# Altium PCB PCB2.PcbDoc
Units mm, origin at the board's own origin, x right, y up, seen from the top; angles counter-clockwise.
Board outline 70.25 x 50.25 mm, 2 copper layers (Top Layer, Bottom Layer); 17 components, 13 nets, 43 pads, 0 vias.
Unrouted connection lines stored in the file: 1.
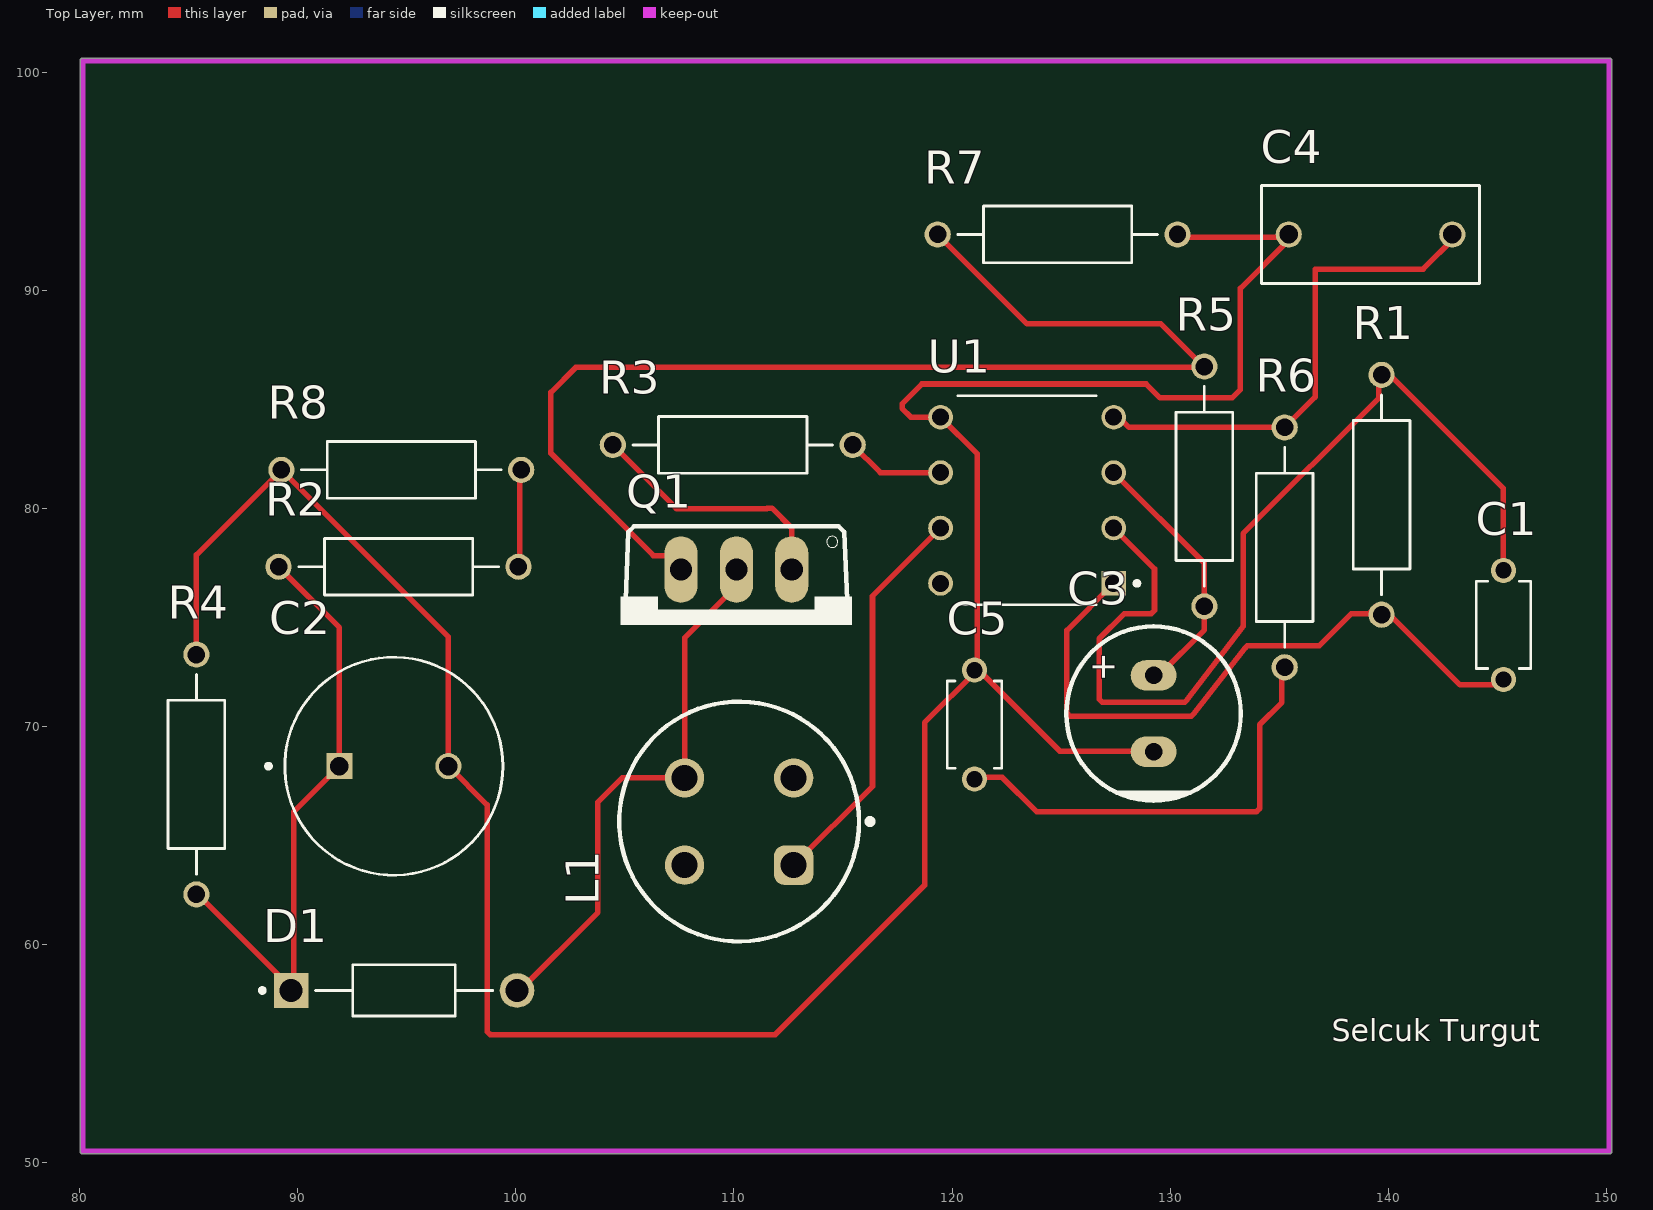
[diagram p0: Top Layer view]
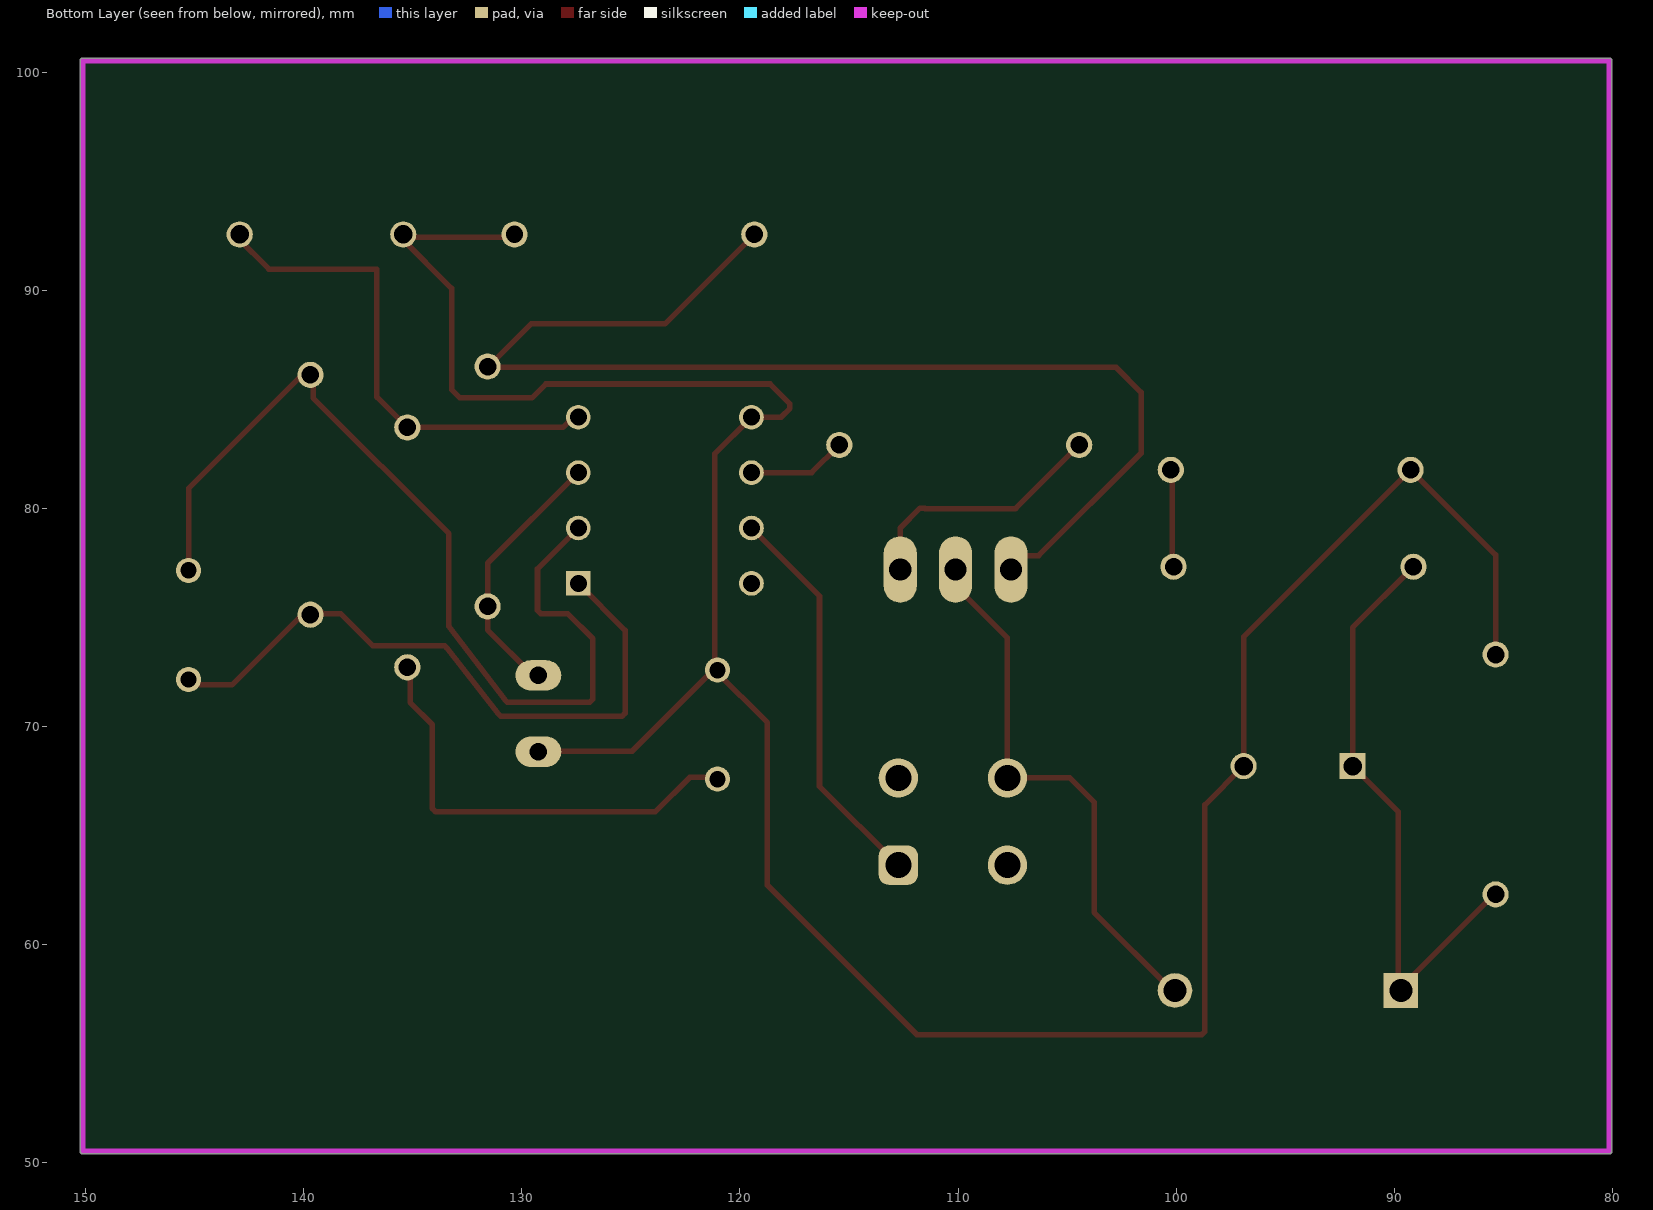
[diagram p1: Bottom Layer view, seen from below]
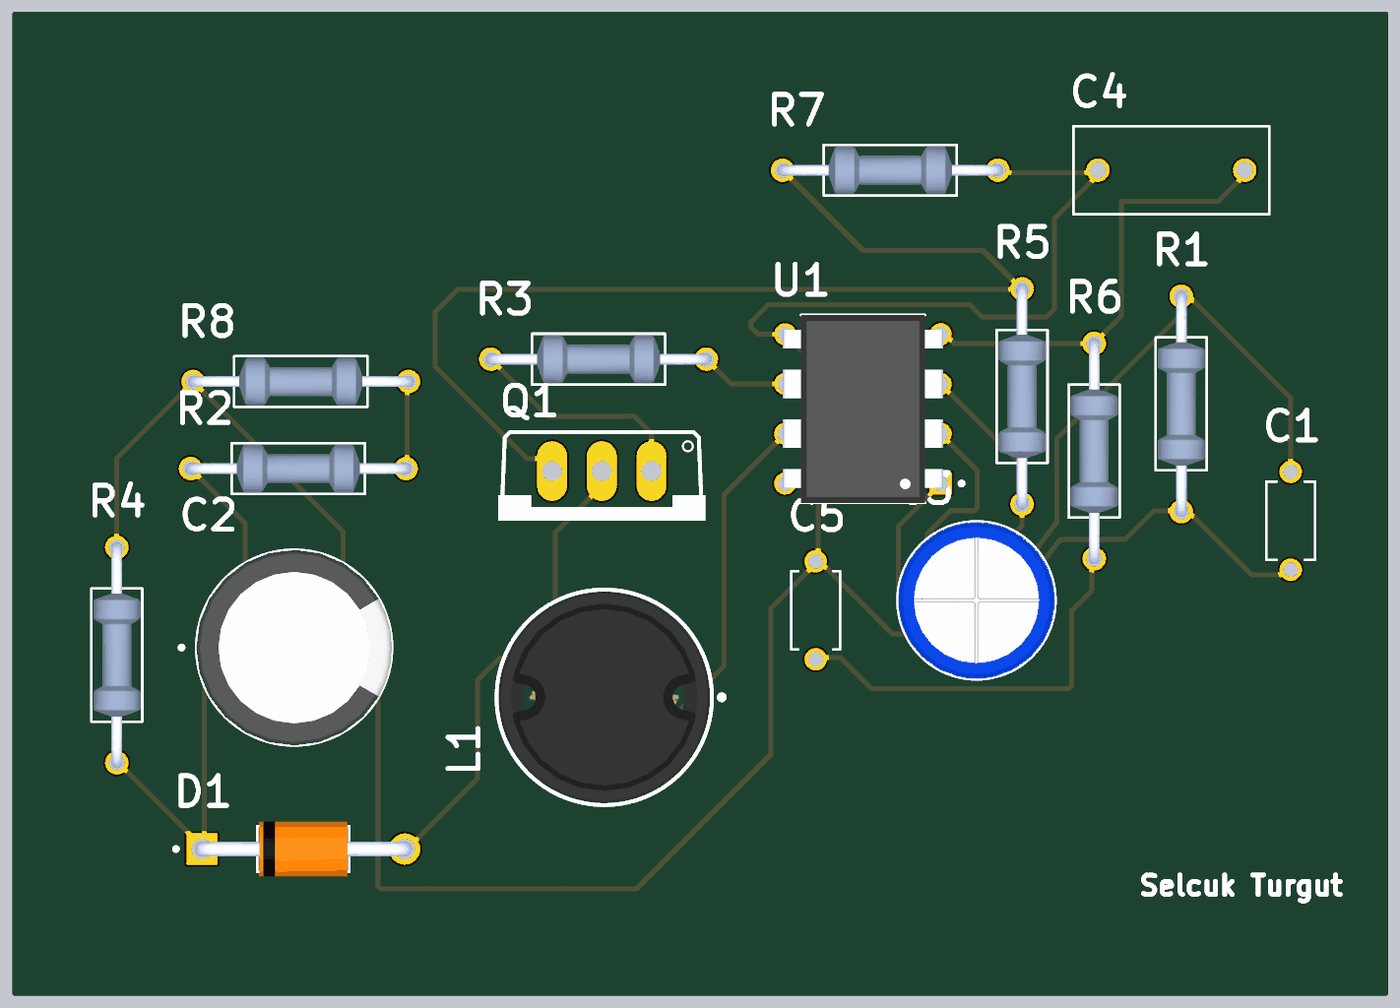
[diagram p2: 3D render of the assembled board from above, using the file's embedded part models]

## Layer stack, top to bottom
Top Solder: solder mask 0.0102, Solder Resist, Dk 3.5
Top Layer: signal copper 0.0356
Dielectric 1: dielectric 0.32, FR-4, Dk 4.8
Bottom Layer: signal copper 0.0356
Bottom Solder: solder mask 0.0102, Solder Resist, Dk 3.5

## Board outline
80.01,50.546 ccw(c80.137,50.546) 80.137,50.419 150.137,50.419 ccw(c150.137,50.546) 150.264,50.546 150.264,100.546 ccw(c150.137,100.546) 150.137,100.673 80.137,100.673 ccw(c80.137,100.546) 80.01,100.546

## Design rules (kind name [scope] priority, off if disabled: settings)
Clearance [All] p1: gap=0.254 ignorepadtopadclearanceinfootprint=FALSE except(0: Arc-Hole Track-Hole SMDPad-Hole THPad-Hole Via-Hole Fill-Hole Poly-Hole Region-Hole Text-Hole)
PolygonConnect [All] p1: connectstyle=Relief reliefconductorwidth=0.254 reliefentries=4 polygonreliefangle="90 Angle" airgapwidth=0.254
RoutingVias [All] p1: holewidth=0.711 width=1.27 viastyle="Through Hole" minholewidth=0.711 minwidth=1.27 maxholewidth=0.711 maxwidth=1.27
SolderMaskExpansion [All] p1: expansion=0.102 istentingtop=FALSE
Width [All] p1: maxlimit=0.254 minlimit=0.254 preferedwidth=0.254
30 further rules are at their usual default settings.

## Components (designator, comment, footprint, x,y, rotation, side; value= is the part's Value field where it differs from the comment)
C1 "22nF" CAP_RDER71H223K0M1H03A 145.288,74.676 r270 top
C2 "1000uF" CAPPRD500W60D1000H1600 94.401,68.199 r0 top
C3 "1.5 nF" "CAP TH ALPOLY D8.00mm S3.50mm H21.50mm" 129.243,70.611 r90 top
C4 "1.5nF" CAPRR750W60L1000T450H1000 139.192,92.583 r180 top
C5 "10nF" CAP_RDER71H103K0K1H03B 121.031,70.104 r90 top
D1 "UF4007" DIOAD1036W78L470D235 94.869,57.912 r0 top
L1 "100uH, 2.45A" WE-TI_1016 110.236,65.659 r180 top
Q1 "IRF640" *TO220V 110.109,74.676 r180 top
R1 "10K" RESAD1100W55L680D260 139.7,80.645 r90 top
R2 "100k" RESAD1100W55L680D260 94.615,77.343 r180 top
R3 "22" RESAD1100W55L680D260 109.943,82.931 r0 top
R4 "48" RESAD1100W55L680D260 85.344,67.818 r270 top
R5 "10" RESAD1100W55L680D260 131.572,81.026 r90 top
R6 "11.46K" RESAD1100W55L680D260 135.255,78.232 r90 top
R7 "0.1" RESAD1100W55L680D260 124.841,92.583 r180 top
R8 "5.6k" RESAD1100W55L680D260 94.742,81.788 r0 top
U1 "UC3843NG4" DIP794W45P254L959H508Q8 123.444,80.391 r180 top

## Footprints (in the part's own frame and the unit in brackets; to place one, negate y for a bottom-side part, rotate by r counter-clockwise, add the part's x,y. Pads: shape width x height; smd on the part's side, far side on the other; paste and mask are expansions set on the pad)
*TO220V [mil]
  oval 60x120 hole 40: 1(-100,-100) 2(0,-100) 3(100,-100)
  silkscreen extent -209,-178 209,0
"CAP TH ALPOLY D8.00mm S3.50mm H21.50mm" [mm] "8.00mm Diameter 21.50mm Lead Spacing Aluminum - Polymer Capacitors Radial, Can"
  oval 1.4x2.1 hole 0.8: 1(1.75,0) 2(-1.75,0)
  silkscreen extent -4,-4 4,4, body extent -4.01,-4 4,4, height 21.5
CAP_RDER71H103K0K1H03B [mm]
  round 1.15 hole 0.75: 1(-2.5,0) 2(2.5,0)
  silkscreen extent -2,-1.25 2,1.25
CAP_RDER71H223K0M1H03A [mm]
  round 1.15 hole 0.75: 1(-2.5,0) 2(2.5,0)
  silkscreen extent -2,-1.25 2,1.25
CAPPRD500W60D1000H1600 [mm]
  round 1.2 hole 0.85: N(2.5,0)
  rect 1.2x1.2 hole 0.85: P(-2.5,0)
  silkscreen extent -5.85,-5 5,5, body extent -5,-5 5,5, height 16
CAPRR750W60L1000T450H1000 [mm]
  round 1.2 hole 0.85: 1(-3.75,0) 2(3.75,0)
  silkscreen extent -5,-2.25 5,2.25
DIOAD1036W78L470D235 [mm]
  round 1.59 hole 1.06: A(5.18,0)
  rect 1.59x1.59 / inner round 1.59 / far side rect 1.59x1.59 hole 1.06: C(-5.18,0)
  silkscreen extent -6.6,-1.17 4.07,1.17, body extent -5.55,-1.4 5.55,1.4, height 2.8
DIP794W45P254L959H508Q8 [mm]
  rect 1.13x1.13 / inner round 1.13 / far side rect 1.13x1.13 hole 0.78: 1(-3.97,3.81)
  round 1.13 hole 0.78: 2(-3.97,1.27) 3(-3.97,-1.27) 4(-3.97,-3.81) 5(3.97,-3.81) 6(3.97,-1.27) 7(3.97,1.27) 8(3.97,3.81)
  silkscreen extent -5.13,-4.79 3.18,4.79, body extent -4.1,-4.79 4.1,4.79, height 5.08
RESAD1100W55L680D260 [mm]
  round 1.2 hole 0.8: 1(-5.5,0) 2(5.5,0)
  silkscreen extent -4.58,-1.3 4.58,1.3, body extent -5.77,-1.2 5.77,1.2, height 2.4
WE-TI_1016 [mm] "THT Radial Leaded Wire Wound Inductor with 4 Pins, body diameter 11mm"
  rrect50% 1.8x1.8 hole 1.2: 1(-2.5,2)
  round 1.8 hole 1.2: 2(2.5,-2) MH1(-2.5,-2) MH2(2.5,2)
  silkscreen extent -6.13,-5.5 5.5,5.5, body extent -5.4,-5.4 5.4,5.4, height 16.05

## Part data
C1: library part RDER71H223K0M1H03A, "Cap Ceramic 1pF 50V C0G 0.25pF Radial 5mm 125C Ammo", Package=None, Availability=Unavailable, MP=RDER71H223K0M1H03A, price=None
C2: library part EEUFK1C102B, "CAP ALUM 1000UF 20% 16V RAD TH", Package="RADIAL-2 Panasonic", Availability="Not in stock", Check_prices=https://www.snapeda.com/parts/EEUFK1C102B/Panasonic/view-part/5795499/?ref=eda, MF=Panasonic, MP=EEUFK1C102B, price=None, SnapEDA_Link=https://www.snapeda.com/parts/EEUFK1C102B/Panasonic/view-part/5795499/?ref=snap
C3 C5: library part RDER71H103K0K1H03B, "Lead Capacitor X7R_EIA_ with Capacitance: 10000pF and Rated Voltage: 50Vdc", Package="Radial Murata", Availability=Unavailable, MF=Murata, MP=RDER71H103K0K1H03B, price=None, SnapEDA_Link=https://www.snapeda.com/parts/RDER71H103K0K1H03B/Murata/view-part/4545040/?ref=snap
C4: library part ECQE6152KF, Package=None, Availability=Unavailable, MP=ECQE6152KF, price=None
D1: "75ns, 1A, 1000V, High Efficient Recovery Rectifier", Package="DO-41-2 Taiwan Semiconductor", Check_prices=https://www.snapeda.com/parts/UF4007/taiwan/view-part/?ref=eda, MF="Taiwan Semiconductor", MP=UF4007, SnapEDA_Link=https://www.snapeda.com/parts/UF4007/taiwan/view-part/?ref=snap
L1: library part 7447221101, "WE-TI Radial Leaded Wire Wound Inductor, size 1016, 100uH, 2.45A, 0.1Ohm", Case/Size Code=1016, DC Resistance Max=0.1Ohm, manufacturer="Wurth Elektronik", Operating Temperature Max=125°C, Operating Temperature Min=-40°C, Rated Current=2.45A, Saturation Current @ 10%=2.75A, Self Resonant Frequency=4MHz, Inductance=100uH, Category="Power Inductors", componentlink1description="Website Link", componentlink1url=https://www.we-online.com/redexpert/article/7447221101?ad, componentlink2description="Datasheet Link", componentlink2url=https://www.we-online.com/redexpert/spec/7447221101?ad, Diameter=11mm, Height=17mm, Manufacturer Part Number=7447221101, Match Code=WE-TI, Mount="Through Hole", packaging=Tray
Q1: "Single-Gate MOSFET Transistors 200V Single N-Channel HEXFET", Package="TO-220 STMicroelectronics", Check_prices=https://www.snapeda.com/parts/IRF640/STMicroelectronics/view-part/?ref=eda, MF=STMicroelectronics, MP=IRF640, SnapEDA_Link=https://www.snapeda.com/parts/IRF640/STMicroelectronics/view-part/?ref=snap
R1 R2 R3 R4 R5 R6 R7 R8: library part MFR-25FBF52-1K, "1.07 kOhms Â±1% 0.25W, 1/4W Through Hole Resistor Axial - Metal Film", Package="RADIAL-2 YAGEO", Check_prices=https://www.snapeda.com/parts/MFR-25FBF52-1K/Yageo/view-part/?ref=eda, MF=Yageo, MP=MFR-25FBF52-1K, SnapEDA_Link=https://www.snapeda.com/parts/MFR-25FBF52-1K/Yageo/view-part/?ref=snap
U1: "Single ended 500KHz current mode PWM controller with 8.4V/7.6V UVLO 100% duty cycle, 0C to 70C 8-PDIP 0 to 70", Package="PDIP-8 Texas", Check_prices=https://www.snapeda.com/parts/UC3843NG4/Texas+Instruments/view-part/?ref=eda, MF="Texas Instruments", MP=UC3843NG4, SnapEDA_Link=https://www.snapeda.com/parts/UC3843NG4/Texas+Instruments/view-part/?ref=snap

## Nets (pads, with @x,y where several pads share a name; then routed paths per layer and width w, separated by ;. In a path a pad name is that pad's centre, name@x,y a point inside that pad or via, vN(x,y) a via of type N, cw(c..) or ccw(c..) an arc to the next point about the centre after c; other vN are vias at no path point)
COMP: C1.2 R1.1 U1.1 | length 30.7
  Top Layer w0.254: U1.1 125.262,74.429 125.262,70.634 125.411,70.485 130.968,70.485 131.092,70.609 133.452,73.628 133.537,73.713 136.832,73.713 138.303,75.184 139.102,75.184 139.444,75.526 139.7,75.526 143.304,71.922 C1.2@145.288,71.922
GND: C2.N C3.2 C4.2 C5.2 R4.1 R7.1 R8.1 U1.5 | length 127.3
  Top Layer w0.254: R4.1 85.344,77.89 R8.1 96.901,74.129 C2.N 98.679,66.421 98.679,56.029 98.828,55.88 111.887,55.88 118.745,62.738 118.745,70.191 C5.2@121.158,72.604 ; C3.2@129.159,68.89 124.939,68.89 121.225,72.604 C5.2@121.158,72.604 ; R7.1@130.341,92.964 130.341,92.893 130.778,92.456 135.569,92.456 133.223,90.11 133.223,85.471 132.842,85.09 129.54,85.09 128.905,85.725 118.618,85.725 117.707,84.814 117.707,84.604 118.11,84.201 U1.5 121.158,82.517 C5.2@121.158,72.604
ISENSE: C3.1 R5.1 U1.3 | length 12.2
  Top Layer w0.254: U1.3 131.572,77.503 R5.1 131.572,74.453 129.509,72.39 C3.1@129.159,72.39
NetC2_P: C2.P D1.C R2.2 R4.2 | length 27.7
  Top Layer w0.254: R4.2 85.41,62.318 89.816,57.912 89.816,66.114 C2.P 91.901,74.557 R2.2
NetD1_A: D1.A L1.2 Q1.2 | length 25.1
  Top Layer w0.254: D1.A@100.176,57.912 103.759,61.495 103.759,66.548 104.87,67.659 L1.2 107.736,74.081 110.109,76.454 Q1.2
NetQ1_1: Q1.1 R3.1 | length 11.7
  Top Layer w0.254: R3.1 107.364,80.01 111.506,80.01 111.528,80.032 111.738,80.032 112.649,79.121 Q1.1
NetQ1_3: Q1.3 R5.2 R7.2 | length 56.2
  Top Layer w0.254: Q1.3 107.569,77.264 106.982,77.851 106.299,77.851 101.6,82.55 101.6,85.344 102.743,86.487 R5.2@131.484,86.487 ; R7.2 123.444,88.48 129.579,88.48 131.533,86.526 R5.2 ; R5.2@131.508,86.462 R5.2@131.572,86.399
NetR2_1: R2.1 R8.2 | length 4.5
  Top Layer w0.254: R2.1 100.178,77.406 100.178,81.724 R8.2
NetR3_2: R3.2 U1.6 | length 4.6
  Top Layer w0.254: R3.2 116.713,81.661 U1.6
RT/CT: C4.1 R6.2 U1.4 | length 22.9
  Top Layer w0.254: U1.4 127.651,84.201 128.12,83.732 R6.2 136.652,85.129 136.652,90.992 141.605,90.992 C4.1@143.069,92.456
VCC: L1.1 U1.7 | length 18.3
  Top Layer w0.254: L1.1 116.352,67.275 116.352,75.999 U1.7
VFB: C1.1 R1.2 U1.2 | length 45.3
  Top Layer w0.254: U1.2 129.286,77.249 129.286,75.343 129.137,75.195 127.9,75.195 126.746,74.041 126.746,71.269 126.895,71.12 130.663,71.12 130.737,71.194 130.749,71.206 133.35,74.614 133.35,78.867 139.573,85.09 139.573,86.399 139.7,86.526 145.288,80.938 C1.1@145.288,76.922
VREF: C5.1 R6.1 U1.8 | length 21.1
  Top Layer w0.254: U1.8@119.474,76.344 U1.8 ; C5.1@120.983,67.604 121.158,67.604 121.245,67.691 122.301,67.691 123.883,66.109 133.963,66.109 134.112,66.258 134.112,70.104 135.128,71.12 135.128,72.605 R6.1
pads on no net: L1.MH1 L1.MH2

## Keep-outs
Keep-Out Layer:
  lines w0.254: 80.137,50.546 150.137,50.546 150.137,100.546 148.979,100.546 80.137,100.546 80.137,50.546

## Silkscreen, mask and mechanical layers (free items; w line width, h text height)
Top Overlay:
  text "Selcuk Turgut" at 137.414,55.578 h1

## Text inside footprints (layer, text, board x,y; h text height)
C3: Top Overlay "+" at 127.843,72.061 h2 r90
Q1: Mechanical 4 "1" at 113.284,78.101 h1.88 r180; Mechanical 4 "2" at 110.744,78.101 h1.88 r180; Mechanical 4 "3" at 108.204,78.101 h1.88 r180; Mechanical 4 "1" at 113.284,78.101 h1.88 r180; Mechanical 4 "2" at 110.744,78.101 h1.88 r180; Mechanical 4 "3" at 108.204,78.101 h1.88 r180